# EAGLE board Mainboard - Prototype 1 (EAGLE 7.2.0)
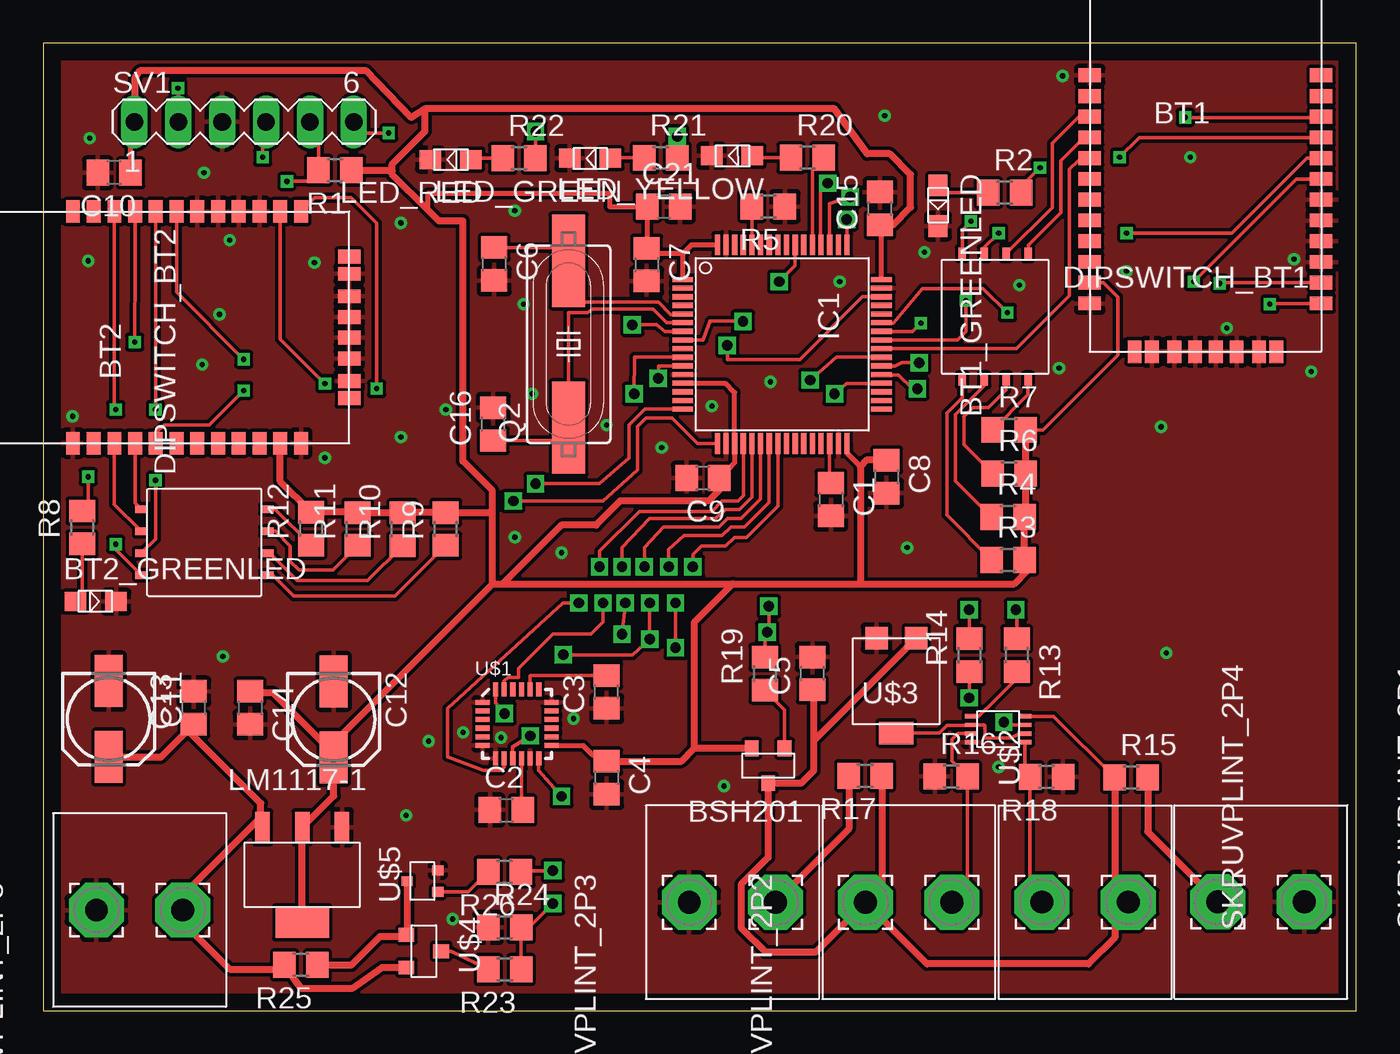
[diagram p0: board, top side]
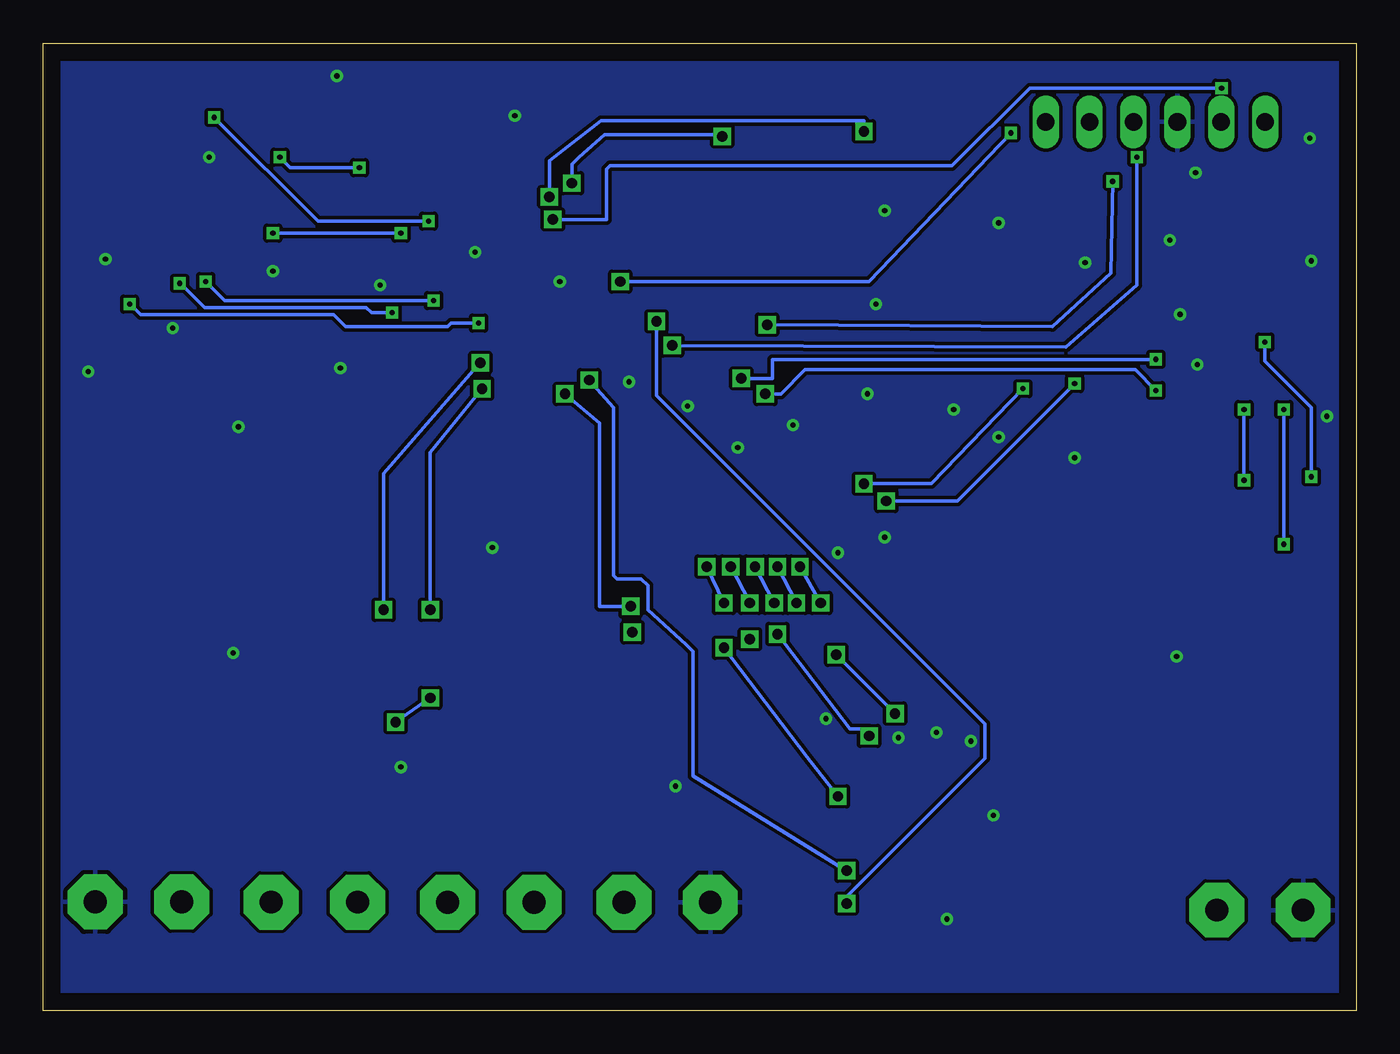
[diagram p1: board, bottom side, seen from below]

Size 76 x 56 mm. Coordinates in mm from the lower left corner, seen from the top.
Outline: 0,0 76,0 76,56 0,56 0,0
Copper layers (1*16): Top 0.035mm / dielectric 1.5mm / Bottom 0.035mm
Design rules "default *": minimum track width 0.2mm, minimum drill 0.3mm, track to track 0.2mm, track to pad 0.2mm, pad to pad 0.2mm, via to via 0.2mm, smd to smd 0mil, copper to edge 40mil, drill to drill 8mil, minimum pad ring 10mil, minimum via ring 8mil, stop-mask expansion 4mil, vias tented up to drill 0mil, thermal gap 10mil

## Footprints (pad centres in the part's own frame; a part is rotated, then mirrored left to right if it is on the bottom)
P-CHANNEL = smd 0.8 x 0.9: DRAIN 0,1; GATE -0.95,-1; SOURCE 0.95,-1
RN42 = smd 1.3 x 0.8: 1 -6.7,3.2; 2 -6.7,2; 3 -6.7,0.8; 4 -6.7,-0.4; 5 -6.7,-1.6; 6 -6.7,-2.8; 7 -6.7,-4; 8 -6.7,-5.2; 9 -6.7,-6.4; 10 -6.7,-7.6; 11 -6.7,-8.8; 12 -6.7,-10; 13 6.7,-10; 14 6.7,-8.8; 15 6.7,-7.6; 16 6.7,-6.4; 17 6.7,-5.2; 18 6.7,-4; 19 6.7,-2.8; 20 6.7,-1.6; 21 6.7,-0.4; 22 6.7,0.8; 23 6.7,2; 24 6.7,3.2 | smd 0.8 x 1.3: 28 3.1,-12.8; 29 -3.1,-12.8; 30 4.1,-12.8; 31 1.8,-12.8; 32 0.6,-12.8; 33 -0.6,-12.8; 34 -1.8,-12.8; 35 -4.1,-12.8
SMD_LED_CUSTOM = smd 1.25 x 1.1: 1 0,0; 2 2.35,0
C0805 = smd 1.3 x 1.5: 1 -0.95,0; 2 0.95,0
153CLV-0505 = smd 3 x 1.6: + 2.2,0; - -2.2,0
DIPSWITCH4P = smd 0.44 x 0.7: B1 0,0; B2 1.27,0; B3 2.54,0; B4 3.81,0; T1 0,7.3; T2 1.27,7.3; T3 2.54,7.3; T4 3.81,7.3
LQFP64 = smd 0.3 x 1.2: 1 -3.75,-5.75; 2 -3.25,-5.75; 3 -2.75,-5.75; 4 -2.25,-5.75; 5 -1.75,-5.75; 6 -1.25,-5.75; 7 -0.75,-5.75; 8 -0.25,-5.75; 9 0.25,-5.75; 10 0.75,-5.75; 11 1.25,-5.75; 12 1.75,-5.75; 13 2.25,-5.75; 14 2.75,-5.75; 15 3.25,-5.75; 16 3.75,-5.75; 33 3.75,5.75; 34 3.25,5.75; 35 2.75,5.75; 36 2.25,5.75; 37 1.75,5.75; 38 1.25,5.75; 39 0.75,5.75; 40 0.25,5.75; 41 -0.25,5.75; 42 -0.75,5.75; 43 -1.25,5.75; 44 -1.75,5.75; 45 -2.25,5.75; 46 -2.75,5.75; 47 -3.25,5.75; 48 -3.75,5.75 | smd 1.2 x 0.3: 17 5.75,-3.75; 18 5.75,-3.25; 19 5.75,-2.75; 20 5.75,-2.25; 21 5.75,-1.75; 22 5.75,-1.25; 23 5.75,-0.75; 24 5.75,-0.25; 25 5.75,0.25; 26 5.75,0.75; 27 5.75,1.25; 28 5.75,1.75; 29 5.75,2.25; 30 5.75,2.75; 31 5.75,3.25; 32 5.75,3.75; 49 -5.75,3.75; 50 -5.75,3.25; 51 -5.75,2.75; 52 -5.75,2.25; 53 -5.75,1.75; 54 -5.75,1.25; 55 -5.75,0.75; 56 -5.75,0.25; 57 -5.75,-0.25; 58 -5.75,-0.75; 59 -5.75,-1.25; 60 -5.75,-1.75; 61 -5.75,-2.25; 62 -5.75,-2.75; 63 -5.75,-3.25; 64 -5.75,-3.75
LM1117 = smd 0.84 x 1.8: ADJ/GND 0,0; INPUT 4.6,0; OUTPUT 2.3,0 | smd 3.1 x 1.8: OUTPUT2 2.3,5.5
HC49UP = smd 5.334 x 1.93: 1 -4.826,0; 2 4.826,0
R0805 = smd 1.3 x 1.5: 1 -0.95,0; 2 0.95,0
SKRUVPLINT_2P = drill 1.321 pad 3.175 octagon: 3 0,5; 4 0,0
MA06-1 = drill 1.016 long: 1 -6.35,0; 2 -3.81,0; 3 -1.27,0; 4 1.27,0; 5 3.81,0; 6 6.35,0
QFN-24 = smd 0.8 x 0.3: 1 -2,1.25; 2 -2,0.75; 3 -2,0.25; 4 -2,-0.25; 5 -2,-0.75; 6 -2,-1.25; 13 2,-1.25; 14 2,-0.75; 15 2,-0.25; 16 2,0.25; 17 2,0.75; 18 2,1.25 | smd 0.3 x 0.8: 7 -1.25,-2; 8 -0.75,-2; 9 -0.25,-2; 10 0.25,-2; 11 0.75,-2; 12 1.25,-2; 19 1.25,2; 20 0.75,2; 21 0.25,2; 22 -0.25,2; 23 -0.75,2; 24 -1.25,2
VSSOP = smd 0.25 x 0.75: P$1 -0.75,-1.55; P$2 -0.25,-1.55; P$3 0.25,-1.55; P$4 0.75,-1.55; P$5 0.75,1.55; P$6 0.25,1.55; P$7 -0.25,1.55; P$8 -0.75,1.55
POT = smd 1.3 x 1.3: P$1_A 1.15,0; P$3_C -1.15,0 | smd 2 x 1.3: P$2_B 0,5.5
SOT-323 = smd 0.559 x 0.648: DRAIN 0,0.895; GATE -0.623,-0.895; SOURCE 0.623,-0.895

## Placement (x,y rotation side)
BSH201  ZXMP10A13F  [P-CHANNEL]  41.96,14.18 180 top
BT1  BLUETOOTH-RN42  [RN42]  67.27,50.94 0 top
BT1_GREENLED  SMD_LED  [SMD_LED_CUSTOM]  51.79,47.76 270 top
BT2  BLUETOOTH-RN42  [RN42]  4.92,39.55 90 top
BT2_GREENLED  SMD_LED  [SMD_LED_CUSTOM]  1.87,23.68 0 top
C1  4u7  [C0805]  45.59,29.59 270 top
C2  100n  [C0805]  26.8,11.61 0 top
C3  2.2n  [C0805]  32.61,18.45 90 top
C4  100n  [C0805]  32.61,13.48 270 top
C5  100n  [C0805]  44.52,19.52 90 top
C6  25p  [C0805]  26.1,43.22 270 top
C7  100n  [C0805]  34.93,43.18 270 top
C8  100n  [C0805]  48.81,30.91 270 top
C9  100n  [C0805]  38.19,30.82 180 top
C10  100n  [C0805]  4.11,48.5 180 top
C11  10u  [153CLV-0505]  3.79,16.88 270 top
C12  10u  [153CLV-0505]  16.81,16.86 270 top
C13  100n  [C0805]  8.72,17.53 90 top
C14  100n  [C0805]  11.97,17.53 270 top
C15  100n  [C0805]  48.43,46.43 90 top
C16  25p  [C0805]  26.05,33.95 90 top
C21  1u  [C0805]  35.92,46.55 0 top
DIPSWITCH_BT1  DIPSWITCH_4P  [DIPSWITCH4P]  53.19,36.52 0 top
DIPSWITCH_BT2  DIPSWITCH_4P  [DIPSWITCH4P]  12.98,25.21 90 top
IC1  STM32F401RBT  [LQFP64]  42.77,38.57 270 top
LED_GREEN  SMD_LED  [SMD_LED_CUSTOM]  32.82,49.33 180 top
LED_RED  SMD_LED  [SMD_LED_CUSTOM]  24.75,49.27 180 top
LED_YELLOW  SMD_LED  [SMD_LED_CUSTOM]  41.04,49.48 180 top
LM1117-1  LM1117  [LM1117]  17.29,10.61 180 top
Q2  18p  [HC49UP]  30.41,38.57 90 top
R1  10k  [R0805]  16.89,48.65 180 top
R2  220  [R0805]  55.65,47.35 0 top
R3  1k  [R0805]  55.84,26.09 0 top
R4  1k  [R0805]  55.84,28.58 0 top
R5  10k  [R0805]  41.97,46.55 180 top
R6  1k  [R0805]  55.91,31.1 0 top
R7  1k  [R0805]  55.91,33.62 0 top
R8  220  [R0805]  2.25,27.97 90 top
R9  1k  [R0805]  23.3,27.88 90 top
R10  1k  [R0805]  20.8,27.86 90 top
R11  1k  [R0805]  18.2,27.88 90 top
R12  1k  [R0805]  15.5,27.9 90 top
R13  1k  [R0805]  56.35,20.58 270 top
R14  1k  [R0805]  53.61,20.57 90 top
R15  150  [R0805]  62.97,13.5 0 top
R16  68  [R0805]  52.55,13.56 0 top
R17  150  [R0805]  47.58,13.6 180 top
R18  68  [R0805]  58.07,13.52 180 top
R19  150  [R0805]  41.77,19.5 90 top
R20  220  [R0805]  44.23,49.37 0 top
R21  220  [R0805]  35.74,49.36 0 top
R22  220  [R0805]  27.54,49.34 0 top
R23  6.8k  [R0805]  26.72,2.39 180 top
R24  3.3k  [R0805]  26.71,4.82 0 top
R25  10k  [R0805]  14.92,2.65 180 top
R26  1k  [R0805]  26.7,8.03 180 top
SKRUVPLINT_2P1  SKRUVPLINT_2P  [SKRUVPLINT_2P]  72.98,6.29 90 top
SKRUVPLINT_2P2  SKRUVPLINT_2P  [SKRUVPLINT_2P]  47.59,6.27 270 top
SKRUVPLINT_2P3  SKRUVPLINT_2P  [SKRUVPLINT_2P]  37.39,6.27 270 top
SKRUVPLINT_2P4  SKRUVPLINT_2P  [SKRUVPLINT_2P]  62.81,6.28 90 top
SKRUVPLINT_2P5  SKRUVPLINT_2P  [SKRUVPLINT_2P]  3.08,5.82 270 top
SV1  [MA06-1]  11.63,51.45 0 top
U$1  MPU-6000  [QFN-24]  27.43,16.6 0 top
U$2  TLV7256  [VSSOP]  55.28,16.29 270 top
U$3  TS53YL  [POT]  49.38,21.57 180 top
U$4  ZXMP10A13F  [P-CHANNEL]  22.03,3.44 270 top
U$5  SI1330EDL  [SOT-323]  21.95,7.5 90 top

## Library data of the parts
BSH201 U$4 = ZXMP10A13F
BT1 BT2 = RN42
BT1_GREENLED BT2_GREENLED LED_GREEN LED_RED LED_YELLOW = greenled_smd
C1-C16 C21 R1 R5 R13-R19 R23-R26 = rcl
DIPSWITCH_BT1 DIPSWITCH_BT2 = dipswitch4p
IC1 = E7020E
LM1117-1 = LM1117-3v3_vreg
Q2 = crystal; OC_FARNELL: unknown; OC_NEWARK: unknown
R2-R4 R6-R12 R20-R22 = resistor
SKRUVPLINT_2P1-SKRUVPLINT_2P5 = skruvplint2p_CTB0700
SV1 = E7020E; OC_FARNELL: unknown; OC_NEWARK: unknown
U$1 = MPU-6000; AVAILABILITY: Good; DESCRIPTION: 3-axis gyroscope, 3-axis accelerometer in a 4x4x0.9 housing; MF: InvenSense; MP: MPU-6000; PACKAGE: QFN-24 InvenSense; PRICE: 7.23 USD
U$2 = TLV7256
U$3 = TS53YL
U$5 = SI1330EDL

## Nets
1PHOTO: R16.2 SKRUVPLINT_2P2.3 U$2.P$3
2PHOTO: R18.2 SKRUVPLINT_2P4.3 U$2.P$5
+3V3: BSH201.SOURCE BT1.11 BT2.11 C4.1 C7.1 C8.1 C9.1 C10.1 C12.+ C14.1 C15.1 C21.1 IC1.1 IC1.13 IC1.19 IC1.32 IC1.48 IC1.64 LM1117-1.OUTPUT LM1117-1.OUTPUT2 R1.1 R3.2 R4.2 R6.2 R7.2 R9.2 R10.2 R11.2 R12.2 SV1.1 U$1.13
BAT_MEAS: IC1.8 R23.1 R24.2
BATMEAS_TOGGLE: IC1.39 R26.1
BT1_CONNSTAT: BT1.19 IC1.41
BT1_GPIO3: BT1.20 DIPSWITCH_BT1.T2
BT1_GPIO4: BT1.22 DIPSWITCH_BT1.T1
BT1_GPIO6: BT1.3 DIPSWITCH_BT1.T3
BT1_GPIO7: BT1.4 DIPSWITCH_BT1.T4
BT1_RESET: BT1.5 IC1.40
BT1_USART1_RX: BT1.14 IC1.43
BT1_USART1_TX: BT1.13 IC1.42
BT2_CONNSTAT: BT2.19 IC1.11
BT2_GPIO3: BT2.20 DIPSWITCH_BT2.T2
BT2_GPIO4: BT2.22 DIPSWITCH_BT2.T1
BT2_GPIO5: BT2.21 R8.2
BT2_GPIO6: BT2.3 DIPSWITCH_BT2.T3
BT2_GPIO7: BT2.4 DIPSWITCH_BT2.T4
BT2_RESET: BT2.5 IC1.10
BT2_USART2_RX: BT2.14 IC1.17
BT2_USART2_TX: BT2.13 IC1.16
GND: BT1.1 BT1.12 BT1.15 BT1.16 BT1.17 BT1.18 BT1.28 BT1.29 BT1.31 BT1.32 BT1.33 BT1.34 BT1_GREENLED.2 BT2.1 BT2.12 BT2.15 BT2.16 BT2.17 BT2.18 BT2.28 BT2.29 BT2.31 BT2.32 BT2.33 BT2.34 BT2_GREENLED.2 C1.2 C2.1 C3.1 C4.2 C5.2 C6.2 C7.2 C8.2 C9.2 C10.2 C11.- C12.- C13.2 C14.2 C15.2 C16.2 C21.2 IC1.12 IC1.18 IC1.31 IC1.47 IC1.63 LED_GREEN.2 LED_RED.2 LED_YELLOW.2 LM1117-1.ADJ/GND R5.1 R16.1 R18.1 R24.1 SKRUVPLINT_2P1.4 SKRUVPLINT_2P3.4 SKRUVPLINT_2P5.4 SV1.3 U$1.1 U$1.6 U$1.7 U$1.11 U$1.18 U$2.P$4 U$3.P$1_A U$5.SOURCE
LED_GREEN: IC1.52 R21.2
LED_RED: IC1.51 R22.2
LED_YELLOW: IC1.53 R20.2
MPU_INT: IC1.24 U$1.12
N$1: C1.1 IC1.30
N$2: IC1.60 R5.2
N$3: R13.2 U$2.P$1
N$4: BT1.21 R2.2
N$5: DIPSWITCH_BT1.B1 R3.1
N$6: DIPSWITCH_BT1.B2 R4.1
N$7: DIPSWITCH_BT1.B3 R6.1
N$8: C6.1 IC1.5 Q2.2
N$9: C16.1 IC1.6 Q2.1
N$10: DIPSWITCH_BT1.B4 R7.1
N$11: BT1_GREENLED.1 R2.1
N$12: DIPSWITCH_BT2.B1 R9.1
N$13: DIPSWITCH_BT2.B2 R10.1
N$14: DIPSWITCH_BT2.B3 R11.1
N$15: DIPSWITCH_BT2.B4 R12.1
N$16: BT2_GREENLED.1 R8.1
N$17: C2.2 U$1.10
N$18: C3.2 U$1.20
N$19: U$2.P$2 U$2.P$6 U$3.P$2_B
N$20: R14.1 U$2.P$7
N$21: R15.2 SKRUVPLINT_2P1.3
N$22: R17.2 SKRUVPLINT_2P3.3
N$23: BSH201.GATE R19.1
N$25: R23.2 U$4.DRAIN
N$26: R25.1 U$4.GATE U$5.DRAIN
N$27: R26.2 U$5.GATE
N$28: LED_YELLOW.1 R20.1
N$31: LED_GREEN.1 R21.1
N$33: LED_RED.1 R22.1
NRST: IC1.7 R1.2 SV1.5
PHOTO1_OUT: IC1.38 R13.1
PHOTO2_OUT: IC1.37 R14.2
PHOTOMEAS_TOGGLE: IC1.36 R19.2
PHOTOVDD: BSH201.DRAIN C5.1 R15.1 R17.1 SKRUVPLINT_2P2.4 SKRUVPLINT_2P4.4 U$2.P$8 U$3.P$3_C
SPI1_MISO: IC1.22 U$1.9
SPI1_MOSI: IC1.23 U$1.24
SPI1_NSS: IC1.20 U$1.8
SPI1_SCK: IC1.21 U$1.23
SWCLK: IC1.49 SV1.2
SWDIO: IC1.46 SV1.4
SWO: IC1.55 SV1.6
VREGIN: C11.+ C13.1 LM1117-1.INPUT R25.2 SKRUVPLINT_2P5.3 U$4.SOURCE

## Tracks (layer width: path | path; a pad name or v marks a point on that pad's centre or on a via)
1PHOTO
  Top 0.2: U$2.P$3 52.94,16.04 52.6,15.7 52.6,14.46 R16.2 53.5,7.18 SKRUVPLINT_2P2.3
2PHOTO
  Top 0.2: U$2.P$5 56.83,13.81 R18.2 57.12,6.97 SKRUVPLINT_2P4.3
+3V3
  Top 0.2: 39.6,31.3 39.6,31.28 C9.1 | 32.2,14.8 32.24,14.8 C4.1 | BT1.11 61.36,42.14 62.2,41.3 62.2,37.96 57.86,33.62 R7.2
  Top 0.3: 32.2,14.8 31.8,14.8 31.25,15.35 U$1.13 | 39.6,31.3 40.02,31.72 IC1.19 40.02,35.78 39.48,36.32 IC1.13 | IC1.32 46.52,32.28 47.3,31.5 | IC1.48 48.52,45.39 | IC1.1 37.02,43.82 | 37.02,43.82 37.52,44.32 IC1.64 | 37.02,43.82 35.24,43.82 C7.1 34.97,44.13 C21.1 | C10.1 5.06,51.23 SV1.1 | 34.93,46.51 32.8,46.51 32.8,47.3 22.25,47.3 22.25,46.35
  Top 0.4: LM1117-1.OUTPUT 16.81,12.43 C12.+ 16.81,15.51 | LM1117-1.OUTPUT 14.99,10.41 15,10.4 | LM1117-1.OUTPUT2 LM1117-1.OUTPUT | R7.2 R6.2 56.86,28.65 R4.2 R3.2 57,25.88 57,25.5 56.2,24.7 47.4,24.7 | 48.52,45.39 C15.1 49.18,45.48 50.2,46.5 50.2,48.4 49,49.6 47.7,49.6 45.8,52.2 22.1,52.2 | 16.81,15.51 26,24.7 | 26,24.7 26.6,24.7 | 26.6,24.7 39.9,24.7 | 39.9,24.7 47.4,24.7 | 16.81,15.51 16.19,15.51 13.3,18.4 12.05,18.4 C14.1 | 26,24.7 26,29 | 26,29 26,30.1 24.3,31.8 24.3,45.7 22.9,45.7 22.25,46.35 20.2,48.4 20.2,48.6 | 26,29 25.83,28.83 R9.2 20.82,28.83 R10.2 18.22,28.81 R11.2 18.18,28.85 R12.2 13.72,30.63 BT2.11 | C8.1 47.66,31.86 47.3,31.5 47.3,24.8 47.4,24.7 | C4.1 36.93,14.43 37.7,15.2 | 37.7,15.2 37.7,22.5 39.9,24.7 | BSH201.SOURCE 37.72,15.18 37.7,15.2 | 34.93,46.51 C21.1 | 22.1,52.2 21.3,51.7 18.7,54.4 5.6,54.4 5.3,54 5.3,51.47 SV1.1 | R1.1 20.15,48.65 20.2,48.6 | 20.2,48.6 20.2,49 22.1,50.9 22.1,52.2 | C9.1 39.14,30.14 38.5,29.5 33.4,29.5 32,28.1 30,28.1 26.6,24.7
BAT_MEAS  (via drill 0.6)
  Top 0.2: R23.1 R24.2 28.12,4.82 v29.5,6.2 | v40.5,39.9 38.6,39.9 38.2,38.8 37.04,38.8 IC1.8
  Bottom 0.2: v29.5,6.2 29.5,6.6 21.5,14.6 21.5,16.6 40.5,35.6 v40.5,39.9
BATMEAS_TOGGLE  (via drill 0.6)
  Top 0.2: IC1.39 45.92,37.82 v44.4,36.5 | 27.68,8 R26.1 27.72,8.1 v29.5,8.1
  Bottom 0.2: v44.4,36.5 43,34.9 43,25.2 42.8,25 41.4,25 41,24.6 41,23.2 38.8,21.2 38.4,20.8 38.4,13.6 30.8,8.9 v29.5,8.1
BT1_CONNSTAT  (via drill 0.3)
  Top 0.2: IC1.41 52.92,38.82 53.4,39.3 v53.4,41.1 | BT1.19 72.54,48.14 v66.6,42.2
  Bottom 0.2: v53.4,41.1 65.5,41.1 v66.6,42.2
BT1_GPIO3  (via drill 0.3)
  Top 0.2: DIPSWITCH_BT1.T2 54.46,44.16 v55.3,45 | v62.7,45 68.8,45 73.14,49.34 BT1.20
  Bottom 0.2: v55.3,45 v62.7,45
BT1_GPIO4  (via drill 0.3)
  Top 0.2: DIPSWITCH_BT1.T1 53.19,45.19 v53.7,45.7 | v66.1,51.7 73.93,51.7 BT1.22
  Bottom 0.2: v53.7,45.7 60.1,45.7 v66.1,51.7
BT1_GPIO6
  Top 0.2: DIPSWITCH_BT1.T3 58.4,46.49 58.4,50.2 59.94,51.74 BT1.3
BT1_GPIO7
  Top 0.2: BT1.4 60.33,50.3 60,50.3 58.9,49.2 58.9,46.2 57.02,44.32 DIPSWITCH_BT1.T4
BT1_RESET
  Top 0.2: IC1.40 56.32,38.32 59.4,41.4 59.4,48.7 59.9,49.2 60.43,49.2 BT1.5
BT1_USART1_RX  (via drill 0.3)
  Top 0.2: v55.8,40.4 54.4,41.8 50.9,41.8 49.2,39.8 48.54,39.8 IC1.43 | BT1.14 68.14,42.14 v68.1,42.1
  Bottom 0.2: v55.8,40.4 57,40.4 57.3,40.7 66.66,40.7 68.06,42.1 v68.1,42.1
BT1_USART1_TX  (via drill 0.3)
  Top 0.2: IC1.42 50.32,39.32 v50.8,39.8 | BT1.13 71.04,40.94 v71,40.9
  Bottom 0.2: v50.8,39.8 52.4,39.8 52.6,39.6 58.5,39.6 59.2,40.3 70.36,40.3 70.96,40.9 v71,40.9
BT2_CONNSTAT  (via drill 0.3, 0.6)
  Top 0.2: IC1.11 35.62,37.32 v35.6,36.6 | v11.6,37.7 7.72,41.58 BT2.19
  Bottom 0.2: v35.6,36.6 33.8,36.6 33.8,37.7 v11.6,37.7
BT2_GPIO3  (via drill 0.3)
  Top 0.2: DIPSWITCH_BT2.T2 6.5,27.3 v6.5,30.7 | v6.5,34.8 6.52,35.12 BT2.20
  Bottom 0.2: v6.5,30.7 v6.5,34.8
BT2_GPIO4  (via drill 0.3)
  Top 0.2: DIPSWITCH_BT2.T1 4.2,26.69 v4.2,27 | v4.2,34.8 4.12,34.88 BT2.22
  Bottom 0.2: v4.2,27 v4.2,34.8
BT2_GPIO5  (via drill 0.3)
  Top 0.2: BT2.21 5.32,43.32 v5.3,38.7 | v2.6,30.9 2.6,29.27 R8.2
  Bottom 0.2: v5.3,38.7 5.3,37.6 2.6,34.9 v2.6,30.9
BT2_GPIO6
  Top 0.2: BT2.3 4.12,29.31 DIPSWITCH_BT2.T3
BT2_GPIO7
  Top 0.2: BT2.4 5.32,29.38 DIPSWITCH_BT2.T4
BT2_RESET  (via drill 0.3, 0.6)
  Top 0.2: IC1.10 34.22,37.82 v34.2,35.7 | v11.6,35.9 9.6,33.9 7,33.9 6.52,33.42 BT2.5
  Bottom 0.2: v11.6,35.9 12.8,37.1 31.9,37.1 33.3,35.7 v34.2,35.7
BT2_USART2_RX  (via drill 0.3, 0.6)
  Top 0.2: 39,32.8 IC1.17 37.88,32.82 36.4,34.3 34.9,34.3 34.4,33.8 34.4,31.3 32.4,29.5 v27.2,29.5 | BT2.14 13.72,38.88 v16.3,36.3
  Bottom 0.2: v27.2,29.5 23.1,29.5 v16.3,36.3
BT2_USART2_TX  (via drill 0.3, 0.6)
  Top 0.2: IC1.16 34.82,34.82 33.9,33.9 33.9,32 32.2,30.5 v28.5,30.5 | v19.3,36 19.3,45.57 17.82,47.05 15.72,47.05 BT2.13
  Bottom 0.2: v28.5,30.5 24.6,30.5 v19.3,36
GND  (via drill 0.3)
  other vias: 21,11.3 23.7,5.3 22.3,15.6 10.4,20.5 9.2,37.4 2.6,43.4 9.3,48.5 39.4,13 30,26.5 27.3,27.4 46.1,42.2 42.1,36.4 27.3,46.3 56.5,42 66.4,49.4 64.7,33.8 50,26.8 65,20.7 55.3,14.1 32.6,33.9 35.8,32.6 38.7,35 26.5,15.8 30.7,16.9 24.3,16.1 68.5,39.5 73.4,37 72.4,43.5 62.7,42.8 51,43.9 58.8,37.2 59,54.1 48.7,51.8 2.7,50.5 10.2,40.3 10.8,44.6 15.7,43.3 20.7,45.6 16.3,32 20.7,33.2 23.3,34.8 28.3,35.7 27.8,40.9 1.7,34.4
  pour Top: 0,56 0,0 76,0 76,56
  pour Bottom: 0,56 0,0 76,0 76,56
LED_GREEN  (via drill 0.6)
  Top 0.2: 45,44.34 IC1.52 45,44.4 45,47.9 v45.4,47.9 | v36.7,50.6 R21.2
  Bottom 0.2: v36.7,50.6 36.8,50.7 43.5,50.7 45,49.4 45.4,49 v45.4,47.9
LED_RED  (via drill 0.6)
  Top 0.2: 45.5,44.34 IC1.51 45.5,44.5 45.5,46.7 v46.7,47.1 | v28.5,50.9 R22.2
  Bottom 0.2: v46.7,47.1 46.7,49.2 43.7,51.5 28.5,51.5 v28.5,50.9
LED_YELLOW
  Top 0.2: IC1.53 44.52,48.71 R20.2
MPU_INT  (via drill 0.6)
  Top 0.2: IC1.24 42.52,29.22 40.7,27.4 40,27.4 39.5,26.9 38.1,26.9 37.6,26.4 v37.6,25.7 | U$1.12 28.68,13.92 v30,12.4 | v36.6,21 v36.6,23.6
  Bottom 0.2: v37.6,25.7 v36.6,23.6 | v30,12.4 31.8,14.7 v36.6,21
N$1
  Top 0.2: IC1.30 45.52,30.61 C1.1
N$2
  Top 0.2: 40.98,44.36 IC1.60 R5.2
N$3
  Top 0.2: U$2.P$1 54.14,17.04 55.1,18 56.5,19.38 R13.2
N$4  (via drill 0.3)
  Top 0.2: R2.2 56.6,47.7 v57.7,48.8 | v62.3,49.4 63.44,50.54 BT1.21
  Bottom 0.2: v57.7,48.8 61.7,48.8 v62.3,49.4
N$5
  Top 0.2: DIPSWITCH_BT1.B1 53.19,35.49 52.3,34.6 52.3,28.68 R3.1
N$6
  Top 0.2: DIPSWITCH_BT1.B2 54.46,36.16 52.8,34.5 52.8,30.67 R4.1
N$7
  Top 0.2: DIPSWITCH_BT1.B3 55.73,35.93 54.7,34.9 53.8,34.9 53.3,34.4 53.3,32.76 R6.1
N$8
  Top 0.2: 30.47,44.57 30.4,44.5 30.41,44.49 30.41,44 | 30.41,44 Q2.2 30.9,42.91 30.9,41 35.6,41 36.3,40.3 37,40.3 IC1.5 | C6.1 30.24,44.17 30.41,44
N$9
  Top 0.2: 30.5,32.9 30.4,33 | Q2.1 30.4,40.4 31.5,40.4 31.8,40.6 35.3,40.6 36.08,39.82 IC1.6 | 30.4,33 Q2.1 | Q2.1 | C16.1 30.4,33
N$10
  Top 0.2: DIPSWITCH_BT1.B4 57,35.66 R7.1
N$11
  Top 0.2: R2.1 52.2,47.35 BT1_GREENLED.1
N$12
  Top 0.2: DIPSWITCH_BT2.B1 13.29,25.21 14.5,24 20.37,24 R9.1
N$13
  Top 0.2: DIPSWITCH_BT2.B2 13.12,26.48 14.7,24.9 18.79,24.9 R10.1
N$14
  Top 0.2: DIPSWITCH_BT2.B3 13.45,27.75 14.3,26.9 14.3,26 14.8,25.5 16.77,25.5 R11.1
N$15
  Top 0.2: DIPSWITCH_BT2.B4 13.43,29.02 R12.1
N$16
  Top 0.2: R8.1 2.25,24.06 BT2_GREENLED.1
N$17
  Top 0.2: 27.68,11.68 U$1.10
  Top 0.4: 27.68,11.68 C2.2
N$18
  Top 0.2: U$1.20 28.18,19.38 28.2,19.4 C3.2
  Top 0.4: 32.51,19.3 C3.2
N$19
  Top 0.2: U$3.P$2_B 51.87,16.07 52.3,16.5 53.69,16.5 U$2.P$2 54.46,16.54 54.5,16.5 54.5,15.8 56,15.8 56.54,16.04 U$2.P$6
N$20  (via drill 0.6)
  Top 0.2: v53.6,18.1 R14.1 | U$2.P$7 55.86,16.54 v55.6,16.7
  Bottom 0.2: v55.6,16.7 v53.6,18.1
N$21
  Top 0.4: R15.2 63.92,10.35 SKRUVPLINT_2P1.3
N$22
  Top 0.4: R17.2 46.63,10.51 SKRUVPLINT_2P3.3
N$23
  Top 0.2: BSH201.GATE 42.91,17.41 R19.1
N$25
  Top 0.2: U$4.DRAIN 23.62,3.44 R23.2
N$26
  Top 0.4: U$5.DRAIN 21.05,4.42 U$4.GATE 20.94,4.3 19.5,4.3 17.85,2.65 R25.1
N$27
  Top 0.2: U$5.GATE 24.6,6.88 R26.2
N$28
  Top 0.2: R20.1 41.15,49.37 LED_YELLOW.1
N$31
  Top 0.2: R21.1 32.85,49.36 LED_GREEN.1
N$33
  Top 0.2: R22.1 24.52,49.34 LED_RED.1
NRST  (via drill 0.3, 0.6)
  Top 0.2: SV1.5 15.94,50.95 R1.2 15.29,48 v14.1,48 | IC1.7 35.98,39.32 35.5,39.7 v34.1,39.7
  Bottom 0.2: v34.1,39.7 17.6,39.6 14.2,42.7 v14.1,48
PHOTO1_OUT  (via drill 0.6)
  Top 0.2: R13.1 56.35,23.15 v56.3,23.2 | v50.7,37.5 49.7,37.5 49.3,37.3 48.54,37.3 IC1.38
  Bottom 0.2: v56.3,23.2 56.3,31.1 v50.7,37.5
PHOTO2_OUT  (via drill 0.6)
  Top 0.2: R14.2 53.61,23.09 v53.6,23.2 | IC1.37 48.54,36.8 49.5,36.8 50.3,36 v50.6,36
  Bottom 0.2: v53.6,23.2 53.6,32.3 v50.6,36
PHOTOMEAS_TOGGLE  (via drill 0.6)
  Top 0.2: R19.2 41.77,21.77 v41.9,21.9 42,22 v42,23.4 | v45.8,35.7 46.5,36.3 48.5,36.3 IC1.36
  Bottom 0.2: v45.8,35.7 43.8,34 43.8,23.4 v42,23.4
PHOTOVDD
  Top 0.2: U$2.P$8 58.48,17.04 R15.1
  Top 0.4: R17.1 48.53,7.21 SKRUVPLINT_2P2.4 | R15.1 62.02,6.2 | 62.02,6.2 62.02,4.22 60.5,2.7 51.16,2.7 SKRUVPLINT_2P2.4 | SKRUVPLINT_2P4.4 62.1,6.28 62.02,6.2 | 44.6,15.64 44.6,13.9 43.88,13.18 BSH201.DRAIN 41.96,8.86 40.4,7.3 40.4,4.8 41.8,3.4 44.72,3.4 SKRUVPLINT_2P2.4 | 44.6,15.64 U$3.P$3_C | 44.6,15.64 44.6,18.49 C5.1
SPI1_MISO  (via drill 0.6)
  Top 0.2: IC1.22 41.52,29.62 40.4,28.5 39.6,28.5 39.1,28 35.9,28 34.8,26.8 v34.8,25.7 | U$1.9 27.18,15.28 v28.2,15.9 | v33.5,21.8 v33.7,23.6
  Bottom 0.2: v34.8,25.7 v33.7,23.6 | v28.2,15.9 28.2,16.3 29.3,16.3 v33.5,21.8
SPI1_MOSI  (via drill 0.6)
  Top 0.2: IC1.23 42.02,29.42 40.6,28 39.8,28 39.3,27.5 37.1,27.5 36.2,26.7 v36.2,25.7 | U$1.24 26.18,17.82 v26.7,17.2 | v35.1,23.6 v35.1,21.5 34.1,20.6 v30.1,20.6
  Bottom 0.2: v36.2,25.7 v35.1,23.6 | v26.7,17.2 v30.1,20.6
SPI1_NSS  (via drill 0.6)
  Top 0.2: U$1.8 26.68,14.08 26.5,13.9 25.5,13.9 23.4,14.7 23.4,17.5 30.1,23.6 v31,23.6 | IC1.20 40.52,29.82 40.2,29.5 39.3,29.5 38.7,28.9 34.5,28.9 32.2,26.6 v32.2,25.7
  Bottom 0.2: v32.2,25.7 v31,23.6
SPI1_SCK  (via drill 0.6)
  Top 0.2: IC1.21 41.02,29.72 40.3,29 39.5,29 38.9,28.5 35.1,28.5 33.5,26.8 v33.5,25.7 | U$1.23 26.68,19.08 26.9,19.3 27.5,19.3 27.5,19.8 29.5,21.8 31.7,21.8 32.4,22.5 v32.4,23.6
  Bottom 0.2: v33.5,25.7 v32.4,23.6
SWCLK  (via drill 0.3, 0.6)
  Top 0.2: IC1.49 46.52,45.68 v46.5,45.8 | v7.8,53.4 7.8,51.47 SV1.2
  Bottom 0.2: v46.5,45.8 43.4,45.8 43.4,48.7 43.2,48.9 23.4,48.9 18.9,53.4 v7.8,53.4
SWDIO  (via drill 0.3, 0.6)
  Top 0.2: IC1.46 47.42,41.32 43.8,37.7 39.6,37.7 v39.6,38.5 | v12.7,49.4 12.7,51.25 SV1.4
  Bottom 0.2: v39.6,38.5 16.8,38.4 12.7,42 v12.7,49.4
SWO  (via drill 0.3, 0.6)
  Top 0.2: IC1.55 43.52,43.12 v42.6,42.2 | v20,50.8 18.63,50.8 SV1.6
  Bottom 0.2: v42.6,42.2 28.2,42.2 v20,50.8
VREGIN
  Top 0.4: U$4.SOURCE 19.59,2.49 17.9,1.3 14.9,1.3 14.57,1.73 R25.2 13.72,2.4 10.8,2.4 8.08,5.12 SKRUVPLINT_2P5.3 8.08,6.68 12.4,11 | C11.+ 6.82,14.68 8.37,16.23 | 8.37,16.23 C13.1 | 12.4,11 12.6,11.2 12.6,12 8.37,16.23 | LM1117-1.INPUT 12.69,10.51 12.7,10.5 12.7,10.7 12.4,11